# EAGLE board untitled (EAGLE 7.2.0)
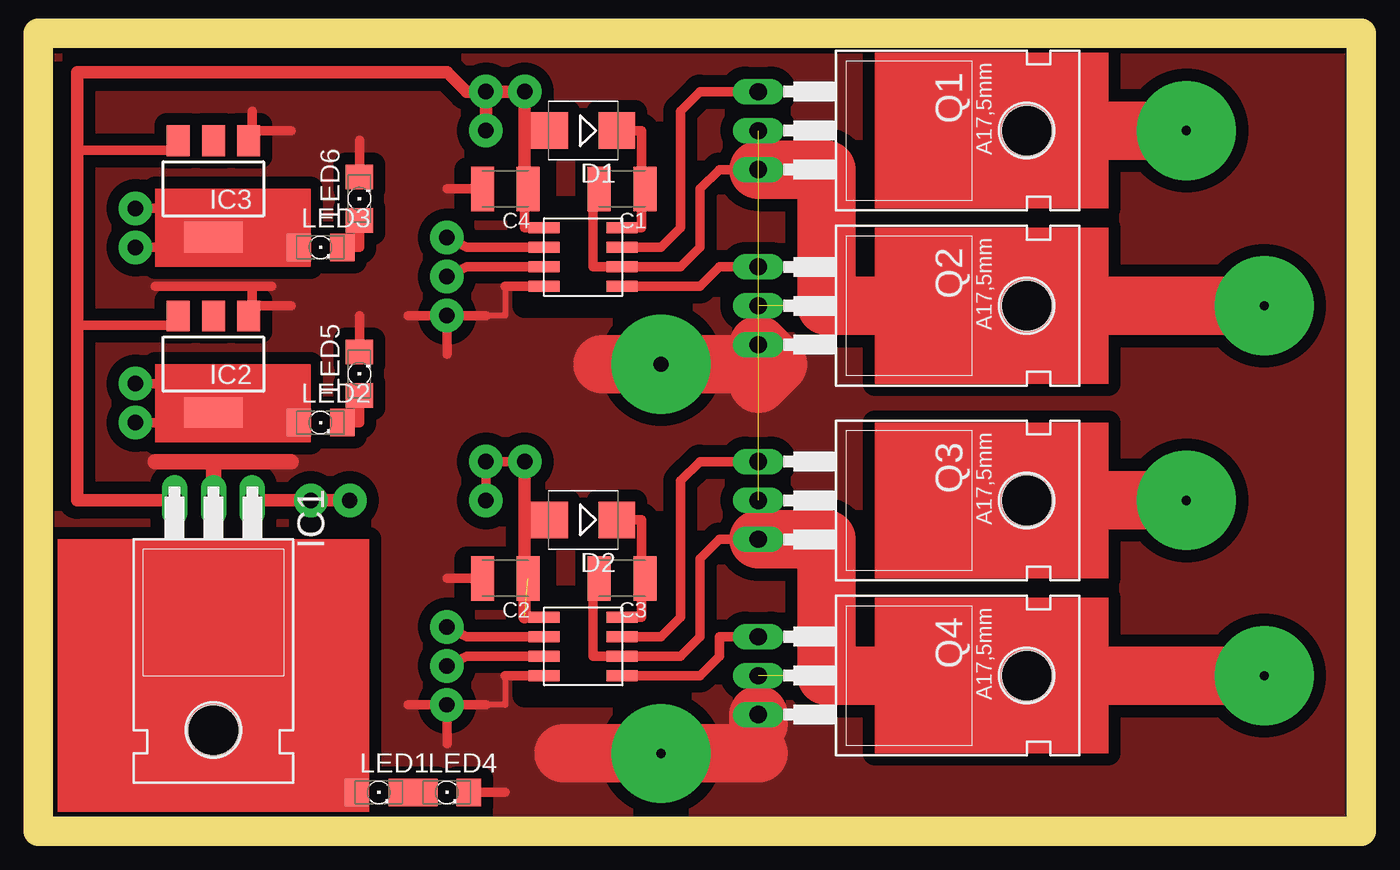
[diagram p0: board, top side]
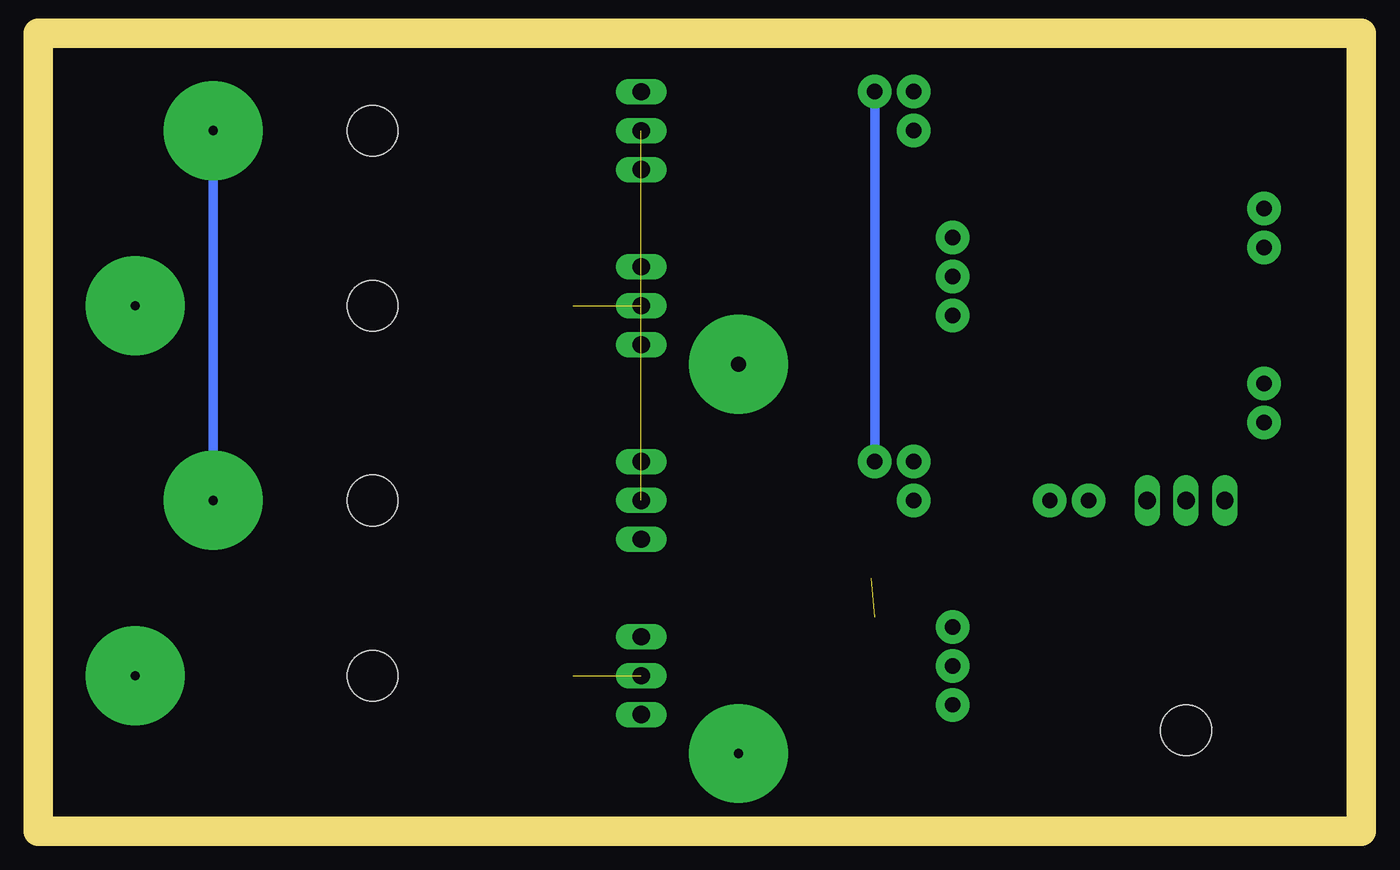
[diagram p1: board, bottom side, seen from below]

Size 86.34 x 51.74 mm. Coordinates in mm from the lower left corner, seen from the top.
Outline: 0,0 86.34,0 86.34,51.74 0,51.74 0,0
Copper layers (1*16): Top 0.035mm / dielectric 1.5mm / Bottom 0.035mm
Design rules "default": minimum track width 10mil, minimum drill 24mil, track to track 8mil, track to pad 8mil, pad to pad 8mil, via to via 8mil, smd to smd 8mil, copper to edge 40mil, drill to drill 8mil, minimum pad ring 10mil, minimum via ring 8mil, stop-mask expansion 4mil, vias tented up to drill 0mil, thermal gap 10mil
tRestrict: area 31.7,34.3 to 39.4,40.6; area 31.7,8.9 to 39.4,15.2; area 27.9,15.2 to 33,17.8; area 27.9,40.6 to 33,43.2
Milling: 4 lines

## Footprints (pad centres in the part's own frame; a part is rotated, then mirrored left to right if it is on the bottom)
C1210K = smd 1.5 x 2.9: 1 -1.5,0; 2 1.5,0
SMB = smd 2.4 x 2.4: A 2.2,0; C -2.2,0
TO220H = drill 1.118 long: 1 -2.54,-10.16; 2 0,-10.16; 3 2.54,-10.16 | hole 3.302: 0,4.826
SOT223 = smd 1.5 x 2: 1 -2.3,-3.15; 2 0,-3.15; 3 2.3,-3.15 | smd 3.8 x 2: 4 0,3.15
LED_1206 = smd 1.6 x 1.803: A -1.422,0; C 1.422,0
TO220BH = drill 1.118 long: D 0,-6.35; G -2.54,-6.35; S 2.54,-6.35 | hole 3.302: 0,11.176
S2103 = smd 0.711 x 2.032: 1 -1.27,-2.54; 2 0,-2.54; 3 1.27,-2.54; 4 2.54,-2.54; 5 2.54,2.54; 6 1.27,2.54; 7 0,2.54; 8 -1.27,2.54

## Placement (x,y rotation side)
C1  [C1210K]  38.1,41.91 180 top
C2  [C1210K]  30.48,16.51 180 top
C3  [C1210K]  38.1,16.51 180 top
C4  [C1210K]  30.48,41.91 180 top
D1  ES2D  [SMB]  35.56,45.72 180 top
D2  ES2D  [SMB]  35.56,20.32 180 top
IC1  7812T  [TO220H]  11.43,11.43 180 top
IC2  LD117AS50TR  [SOT223]  11.43,30.48 180 top
IC3  LD117AS33TR  [SOT223]  11.43,41.91 180 top
LED1  [LED_1206]  22.23,2.54 0 top
LED2  [LED_1206]  18.41,26.67 0 top
LED3  [LED_1206]  18.41,38.1 0 top
LED4  [LED_1206]  26.67,2.54 0 top
LED5  [LED_1206]  20.96,29.84 90 top
LED6  [LED_1206]  20.96,41.27 90 top
Q1  IRFZ48Z  [TO220BH]  53.34,45.72 270 top
Q2  IRFZ48Z  [TO220BH]  53.34,34.29 270 top
Q3  IRFZ48Z  [TO220BH]  53.34,21.59 270 top
Q4  IRFZ48Z  [TO220BH]  53.34,10.16 270 top
U$1  S2103  [S2103]  35.56,38.1 270 top
U$2  S2103  [S2103]  35.56,12.7 270 top

## Library data of the parts
C1-C4 = rcl
D1 D2 = diode
IC1 = linear
IC2 IC3 = v-reg
LED1-LED6 = eagle-ltspice; SPICEMODEL: NONE; SPICEPREFIX: D; SPICETYPE: diode
Q1-Q4 = transistor-power
U$1 U$2 = Kao_lbr

## Nets
24V: Q1.D Q3.D
GND: C2.2 C4.2 Q2.S Q4.S U$1.4 U$2.4
IN1: U$1.2
IN2: U$2.2
MOTOR1: C1.2 Q1.S Q2.D U$1.6
MOTOR2: C3.2 Q3.S Q4.D U$2.6
N$1: C1.1 D1.C U$1.8
N$2: C3.1 D2.C U$2.8
N$3: Q2.G U$1.5
N$4: Q1.G U$1.7
N$5: Q4.G U$2.5
N$6: Q3.G U$2.7
N$11: U$1.3
N$12: U$2.3
N$16: C2.1 C4.1 D1.A D2.A U$1.1 U$2.1

## Tracks (layer width: path | path; a pad name or v marks a point on that pad's centre or on a via)
24V  (1 unrouted)
GND
  Top 0.406: 30.48,35.56 30.48,33.65 29.21,33.65 | 30.48,10.16 30.48,8.26 29.21,8.26
  Top 0.61: C4.2 26.67,41.91 | U$1.4 30.48,35.56 | C2.2 26.67,16.51 | U$2.4 30.48,10.16 | 29.21,8.26 26.67,8.26 | 26.67,8.26 24.13,8.26 | 26.67,5.71 26.67,8.26 | 26.67,31.11 26.67,33.02 | 24.13,33.65 29.21,33.65 | 13.97,46.99 13.97,45.72 16.51,45.72 | 7.62,35.56 13.97,35.56 | 13.97,35.56 15.24,35.56 | 13.97,35.56 13.97,34.29 16.51,34.29 | 20.96,43.18 20.96,45.08 | 20.96,31.75 20.96,33.65 | 30.48,2.54 27.94,2.54
  Top 1.016: 11.43,22.86 11.43,24.13 | 7.62,24.13 11.43,24.13 | 11.43,24.13 16.51,24.13
  Top 3.81: Q2.S 48.26,30.48 | 48.26,30.48 46.99,29.21 | Q4.S 46.99,6.99 | 34.29,5.08 46.99,5.08 | 48.26,30.48 36.83,30.48
  pour Top (isolate 0.8): 1.27,52.07 86.36,52.07 86.36,0 1.27,0
IN1  (via drill 1 pad 2.18)
  Top 0.61: U$1.2 27.94,38.1 v26.67,38.73
IN2  (via drill 1 pad 2.18)
  Top 0.61: U$2.2 27.94,12.7 v26.67,13.34
MOTOR1  (1 unrouted)
  Top 0.61: Q1.S 44.45,43.18 43.18,41.91 43.18,38.1 41.91,36.83 U$1.6 36.2,36.83 36.2,41.91 C1.2
  Top 3.81: Q1.S 51.43,43.18 51.43,34.29 80.01,34.29
MOTOR2  (via drill 0.6 pad 6.45)  (1 unrouted)
  Top 0.61: Q3.S 44.45,19.05 43.18,17.78 43.18,12.7 41.91,11.43 U$2.6 36.2,11.43 36.2,16.51 C3.2
  Top 3.81: Q3.S 51.43,19.05 51.43,10.16 v80.01,10.16
N$1
  Top 0.61: U$1.8 39.37,39.37 39.37,41.91 | C1.1 39.37,41.91 | 39.37,41.91 39.37,45.72 D1.C
N$2
  Top 0.61: D2.C 39.37,20.32 39.37,16.51 | U$2.8 39.37,13.97 39.37,16.51 | 39.37,16.51 C3.1
N$3
  Top 0.61: U$1.5 43.18,35.56 44.45,36.83 Q2.G
N$4
  Top 0.61: U$1.7 40.64,38.1 41.91,39.37 41.91,46.99 43.18,48.26 Q1.G
N$5
  Top 0.61: Q4.G 44.45,12.7 44.45,11.43 43.18,10.16 U$2.5
N$6
  Top 0.61: U$2.7 40.64,12.7 41.91,13.97 41.91,22.86 43.18,24.13 Q3.G
N$7  (via drill 0.6 pad 6.45)
  other vias: 80.01,34.29
N$8  (via drill 0.6 pad 6.45)
  Top 3.81: v74.93,45.72 64.77,45.72 | v74.93,21.59 64.77,21.59
  Bottom 0.61: v74.93,45.72 v74.93,21.59
N$9  (via drill 1 pad 6.45)
  other vias: 40.64,30.48
N$10  (via drill 0.6 pad 6.45)
  other vias: 40.64,5.08
N$11  (via drill 1 pad 2.18)
  Top 0.61: U$1.3 27.94,36.83 v26.67,36.2
N$12  (via drill 1 pad 2.18)
  Top 0.61: U$2.3 27.94,11.43 v26.67,10.79
N$13  (via drill 1 pad 2.18)
  other vias: 26.67,8.26
N$14  (via drill 1 pad 2.18)
  other vias: 29.21,48.26
N$15  (via drill 1 pad 2.18)
  other vias: 29.21,24.13
N$16  (via drill 1 pad 2, 1 pad 2.18)  (1 unrouted)
  Top 0.61: U$2.1 31.75,13.97 | C4.1 31.75,41.91 31.75,39.37 U$1.1 | D2.A 31.75,20.32 | D1.A 31.75,45.72 | v29.21,21.59 29.21,24.13 v31.75,24.13
  Top 0.813: 31.75,13.97 31.75,20.32 v31.75,24.13 | 31.75,41.91 31.75,45.72 v31.75,48.26 29.21,48.26 v29.21,45.72
  Bottom 0.61: v31.75,24.13 v31.75,48.26
N$17  (via drill 1 pad 2.18)
  other vias: 26.67,33.65
N$18
  Top 0.61: 2.54,33.02 8.89,33.02 | 2.54,44.45 8.89,44.45
  Top 0.813: 8.26,21.59 2.54,21.59 2.54,33.02 2.54,44.45 2.54,49.53 26.67,49.53 27.94,48.26 29.21,48.26
N$19  (via drill 1 pad 2.18)
  Top 0.61: v6.35,26.67 7.62,26.67
N$20  (via drill 1 pad 2.18)
  Top 0.61: v6.35,38.1 7.62,38.1
N$21  (via drill 1 pad 2.18)
  Top 0.61: v6.35,40.64 7.62,40.64
N$22  (via drill 1 pad 2.18)
  Top 0.61: v6.35,29.21 7.62,29.21
N$23  (via drill 1 pad 2.18)
  other vias: 17.78,21.59
N$24  (via drill 1 pad 2.18)
  other vias: 20.32,21.59
N$25
  Top 0.813: 14.61,21.59 20.96,21.59
N$27
  Top 0.61: 20.32,26.67 20.96,26.67 20.96,27.94
N$29
  Top 0.61: 20.32,38.1 20.96,38.1 20.96,39.37
(copper drawn outside any net)
  shapes: Top area x7